# Altium PCB Sensor Brushless Driver V1.0.PcbDoc (part 2 of 2)
Units mil, origin at the board's own origin, x right, y up, seen from the top; angles counter-clockwise.
Board outline 3550 x 3910 mil, 2 copper layers (Top Layer, Bottom Layer); 141 components, 73 nets, 386 pads, 826 vias.
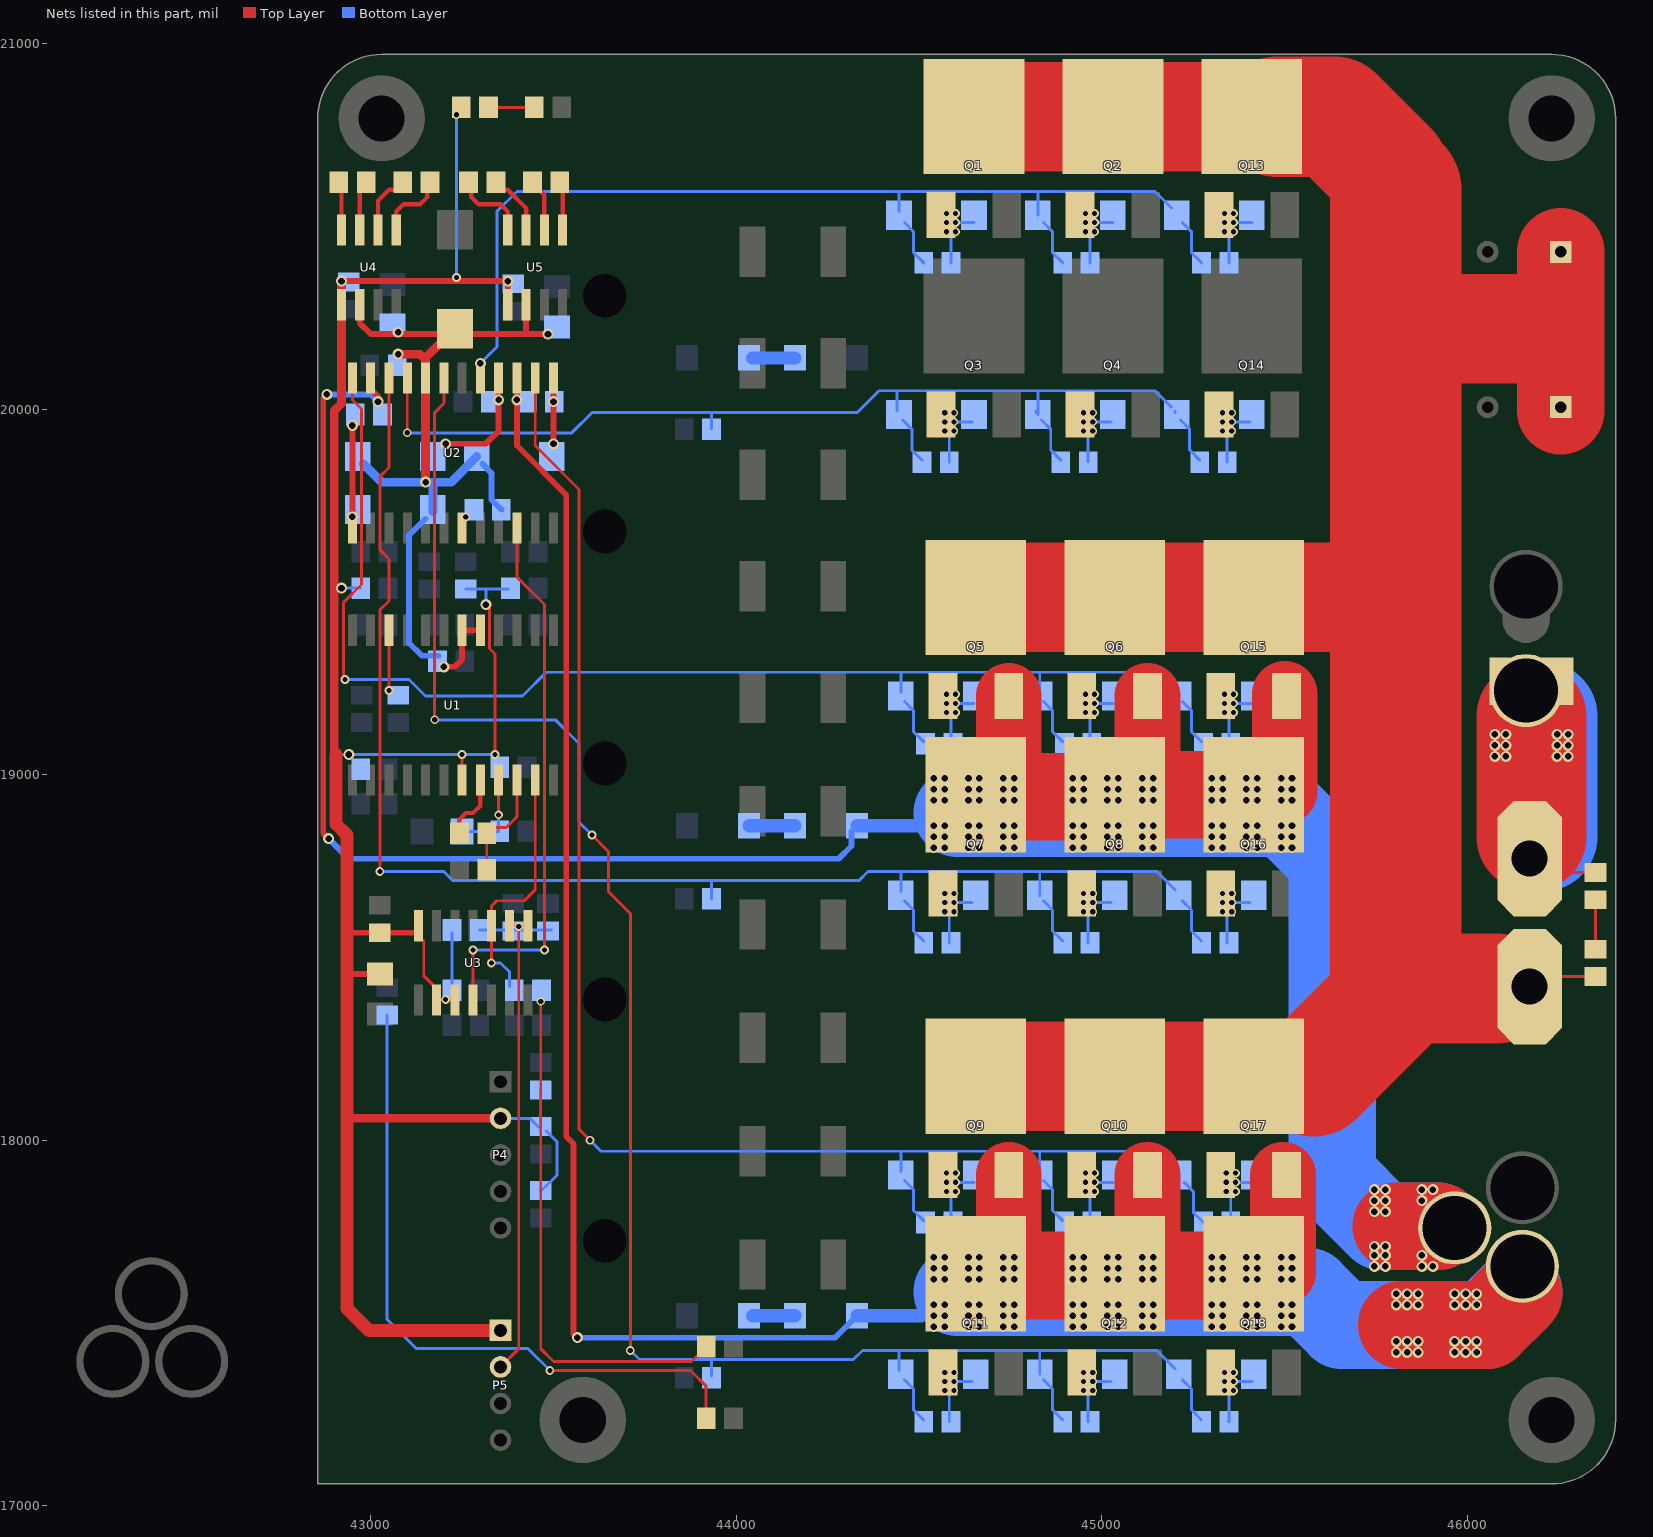
[diagram p2: the nets of this part, all layers, seen from the top]

## Via types
v1: diameter 30, hole 18, Top Layer to Bottom Layer, 597 vias
v2: diameter 24, hole 14, Top Layer to Bottom Layer, 197 vias
v3: diameter 45, hole 28, Top Layer to Bottom Layer, 32 vias

## Nets (pads, with @x,y where several pads share a name; then routed paths per layer and width w, separated by ;. In a path a pad name is that pad's centre, name@x,y a point inside that pad or via, vN(x,y) a via of type N, cw(c..) or ccw(c..) an arc to the next point about the centre after c; other vN are vias at no path point) (continued)
MV: C7.2 D10.2 pad.0@45965,17760 Q5.3 Q6.3 Q7.4 Q8.4 Q15.3 Q16.4 U2.23 | length 7054.2
  Top Layer w16: v1(42880,20040) 42870,20030 42870,18840 v1(42885,18825) ; U2.23@43000,20055 43020,20035 v1(43020,20020)
  Top Layer w180: Q7.4@44744.96,18954.96 Q5.3@44744.96,19215.16 ; Q8.4@45124.96,18949.96 Q6.3@45124.96,19215.16 ; Q16.4@45499.96,18954.96 Q15.3@45499.96,19220.16
  Top Layer w240: Q7.4@44650,18939.84 Q8.4@45014.84,18939.84 ; Q8.4@45030,18944.84 Q16.4@45394.84,18944.84 ; 45805,17765 pad.0@45920,17765
  Bottom Layer w16: v1(42880,20040) 43000,20040 v1(43020,20020) ; v1(42885,18825) 42940,18770 44280,18770 44315,18805 D10.2@44315,18845
  Bottom Layer w36: D10.2@44330,18860 v1@44535,18860
  Bottom Layer w240: 44605,18895 45500,18895 45630,18765 45630,17900 45765,17765 pad.0@45920,17765
  other v1: 45745,17655 45775,17655 45875,17655 45905,17655 45745,17685 45775,17685 45875,17685 45745,17710 45775,17710 45745,17805 45775,17805 45745,17835 45775,17835 45875,17835 45745,17865 45775,17865 45875,17865 45905,17865 44540,18800 44570,18800 44635,18800 44665,18800 44730,18800 44760,18800 44920,18800 44950,18800 45015,18800 45045,18800 45110,18800 45140,18800 45300,18800 45330,18800 45395,18800 45425,18800 45490,18800 45520,18800 44540,18830 44570,18830 44635,18830 44665,18830 44730,18830 44760,18830 44920,18830 44950,18830 45015,18830 45045,18830 45110,18830 45140,18830 45300,18830 45330,18830 45395,18830 45425,18830 45490,18830 45520,18830 44540,18860 44570,18860 44635,18860 44665,18860 44730,18860 44760,18860 44920,18860 44950,18860 45015,18860 45045,18860 45110,18860 45140,18860 45300,18860 45330,18860 45395,18860 45425,18860 45490,18860 45520,18860 44540,18930 44570,18930 44635,18930 44665,18930 44730,18930 44760,18930 44920,18930 44950,18930 45015,18930 45045,18930 45110,18930 45140,18930 45300,18930 45330,18930 45395,18930 45425,18930 45490,18930 45520,18930 44540,18960 44570,18960 44635,18960 44665,18960 44730,18960 44760,18960 44920,18960 44950,18960 45015,18960 45045,18960 45110,18960 45140,18960 45300,18960 45330,18960 45395,18960 45425,18960 45490,18960 45520,18960 44540,18990 44570,18990 44635,18990 44665,18990 44730,18990 44760,18990 44920,18990 44950,18990 45015,18990 45045,18990 45110,18990 45140,18990 45300,18990 45330,18990 45395,18990 45425,18990 45490,18990 45520,18990
MW: C17.2 D17.2 pad.0@46150,17655 Q9.3 Q10.3 Q11.4 Q12.4 Q17.3 Q18.4 U2.15 | length 7143.2
  Top Layer w16: U2.15@43400,20085 43400,19900 43535,19765 43535,18010 43555,17990 43555,17470 v1(43565,17460)
  Top Layer w180: Q11.4@44744.96,17644.96 Q9.3@44744.96,17905.16 ; Q12.4@45124.96,17639.96 Q10.3@45124.96,17905.16 ; Q18.4@45494.96,17639.96 Q17.3@45494.96,17905.16
  Top Layer w240: Q11.4@44655,17629.84 Q12.4@45019.84,17629.84 ; Q12.4@45035,17629.84 Q18.4@45399.84,17629.84 ; 45820,17495 46055,17495 pad.0@46140,17580
  Bottom Layer w16: v1(43565,17460) 44270,17460 D17.2@44330,17520
  Bottom Layer w36: D17.2@44330,17520 44505,17520
  Bottom Layer w240: 44605,17585 45565,17585 45655,17495 46050,17495 pad.0@46140,17585
  other v1: 45805,17420 45835,17420 45865,17420 45965,17420 45995,17420 46025,17420 45805,17450 45835,17450 45865,17450 45965,17450 45995,17450 46025,17450 44540,17490 44570,17490 44635,17490 44665,17490 44730,17490 44760,17490 44920,17490 44950,17490 45015,17490 45045,17490 45110,17490 45140,17490 45300,17490 45330,17490 45395,17490 45425,17490 45490,17490 45520,17490 44540,17520 44570,17520 44635,17520 44665,17520 44730,17520 44760,17520 44920,17520 44950,17520 45015,17520 45045,17520 45110,17520 45140,17520 45300,17520 45330,17520 45395,17520 45425,17520 45490,17520 45520,17520 44540,17550 44570,17550 44635,17550 44665,17550 44730,17550 44760,17550 44920,17550 44950,17550 45015,17550 45045,17550 45110,17550 45140,17550 45300,17550 45330,17550 45395,17550 45425,17550 45490,17550 45520,17550 45805,17550 45835,17550 45865,17550 45965,17550 45995,17550 46025,17550 45805,17580 45835,17580 45865,17580 45965,17580 45995,17580 46025,17580 44540,17620 44570,17620 44635,17620 44665,17620 44730,17620 44760,17620 44920,17620 44950,17620 45015,17620 45045,17620 45110,17620 45140,17620 45300,17620 45330,17620 45395,17620 45425,17620 45490,17620 45520,17620 44540,17650 44570,17650 44635,17650 44665,17650 44730,17650 44760,17650 44920,17650 44950,17650 45015,17650 45045,17650 45110,17650 45140,17650 45300,17650 45330,17650 45395,17650 45425,17650 45490,17650 45520,17650 44540,17680 44570,17680 44635,17680 44665,17680 44730,17680 44760,17680 44920,17680 44950,17680 45015,17680 45045,17680 45110,17680 45140,17680 45300,17680 45330,17680 45395,17680 45425,17680 45490,17680 45520,17680 43400,20025
NetC4_1: C4.1 D5.2 U2.16 | length 289.5
  Top Layer w16: v1(43205,19905) 43315,19905 43350,19940 43350,20020 U2.16@43350,20070
  other v1: 43350,20025
NetC7_1: C7.1 D12.2 U2.1 | length 285
  Top Layer w16: U2.1@42950,19670 v1(42950,19955)
  other v1: 42950,19705
NetC8_1: C8.1 R20.2 U1.9 | length 225
  Top Layer w8: v2(43350,18890) U1.9@43350,18980
  Bottom Layer w8: C8.1@43260,18845 43350,18845 v2(43350,18890)
NetC9_1: C9.1 R21.2 U1.10 | length 289.8
  Top Layer w8: C9.1@43317.4,18740 R21.2@43317.4,18837.4 ; R21.2@43320,18855 43370,18855 43400,18885 U1.10@43400,18985
NetC12_1: C12.1 U4.1 | length 181.6
  Top Layer w12: U4.1@43070,20490 43070,20540 43090,20560 43135,20560 43155,20580 C12.1@43155,20610
NetC12_2: C12.2 U4.2 | length 147.4
  Top Layer w12: U4.2@43020,20490 43020,20570 43050,20600 C12.2@43075,20600
NetC14_1: C14.1 U4.3 | length 115
  Top Layer w12: U4.3@42970,20490 C14.1@42970,20605
NetC14_2: C14.2 U4.4 | length 120
  Top Layer w12: U4.4@42920,20490 C14.2@42920,20610
NetC17_1: C17.1 D19.2 U2.13 | length 180
  Top Layer w16: v1(43500,19905) v1(43500,20020) U2.13@43500,20085
NetC20_1: C20.1 U5.1 | length 130
  Top Layer w12: U5.1@43525,20490 C20.1@43525,20620
NetC20_2: C20.2 U5.2 | length 130.4
  Top Layer w12: C20.2@43450,20610 43475,20585 U5.2@43475,20490
NetC22_1: C22.1 U5.3 | length 165.7
  Top Layer w12: C22.1@43340,20600 43375,20600 43425,20550 U5.3@43425,20490
NetC22_2: C22.2 U5.4 | length 196.6
  Top Layer w12: C22.2@43275,20610 43275,20580 43295,20560 43355,20560 43375,20540 U5.4@43375,20490
NetD1_1: D1.1 Q1.1 R1.2 | length 147.4
  Bottom Layer w8: R1.2@44587.4,20400 44587.4,20492.4 ; v2@44595,20510 D1.1@44650,20510
  other v2: 44575,20485 44600,20485 44575,20510 44600,20510 44575,20535 44600,20535
NetD2_1: D2.1 Q2.1 R2.2 | length 147.4
  Bottom Layer w8: R2.2@44967.4,20400 44967.4,20492.4 ; v2@44975,20510 D2.1@45030,20510
  other v2: 44955,20485 44980,20485 44955,20510 44980,20510 44955,20535 44980,20535
NetD3_1: D3.1 D4.2 | length 115
  Bottom Layer w36: D4.2@44045,20140 D3.1@44160,20140
NetD6_1: D6.1 Q3.1 R6.2 | length 147.4
  Bottom Layer w8: R6.2@44582.4,19855 44582.4,19947.4 ; v2@44590,19965 D6.1@44645,19965
  other v2: 44570,19940 44595,19940 44570,19965 44595,19965 44570,19990 44595,19990
NetD7_1: D7.1 Q4.1 R7.2 | length 147.4
  Bottom Layer w8: R7.2@44962.4,19855 44962.4,19947.4 ; v2@44970,19965 D7.1@45025,19965
  other v2: 44950,19940 44975,19940 44950,19965 44975,19965 44950,19990 44975,19990
NetD8_1: D8.1 Q5.1 R16.2 | length 147.4
  Bottom Layer w8: R16.2@44587.4,19085 44587.4,19177.4 ; v2@44595,19195 D8.1@44650,19195
  other v2: 44575,19170 44600,19170 44600,19170 44575,19195 44575,19195 44600,19195 44600,19195 44575,19220 44575,19220 44600,19220 44600,19220
NetD9_1: D9.1 Q6.1 R17.2 | length 147.4
  Bottom Layer w8: R17.2@44967.4,19085 44967.4,19177.4 ; v2@44975,19195 D9.1@45030,19195
  other v2: 44955,19170 44980,19170 44980,19170 44955,19195 44955,19195 44980,19195 44980,19195 44955,19220 44955,19220 44980,19220 44980,19220
NetD10_1: D10.1 D11.2 | length 125
  Bottom Layer w36: D11.2@44035,18860 D10.1@44160,18860
NetD13_1: D13.1 Q7.1 R23.2 | length 147.4
  Bottom Layer w8: R23.2@44582.4,18540 44582.4,18632.4 ; v2@44590,18650 D13.1@44645,18650
  other v2: 44570,18625 44595,18625 44595,18625 44570,18650 44570,18650 44595,18650 44595,18650 44570,18675 44570,18675 44595,18675 44595,18675
NetD14_1: D14.1 Q8.1 R24.2 | length 147.4
  Bottom Layer w8: R24.2@44962.4,18540 44962.4,18632.4 ; v2@44970,18650 D14.1@45025,18650
  other v2: 44950,18625 44975,18625 44975,18625 44950,18650 44950,18650 44975,18650 44975,18650 44950,18675 44950,18675 44975,18675 44975,18675
NetD15_1: D15.1 Q9.1 R26.2 | length 147.4
  Bottom Layer w8: R26.2@44587.4,17775 44587.4,17867.4 ; v2@44595,17885 D15.1@44650,17885
  other v2: 44575,17860 44600,17860 44600,17860 44575,17885 44575,17885 44600,17885 44600,17885 44575,17910 44575,17910 44600,17910 44600,17910
NetD16_1: D16.1 Q10.1 R27.2 | length 147.4
  Bottom Layer w8: R27.2@44967.4,17775 44967.4,17867.4 ; v2@44975,17885 D16.1@45030,17885
  other v2: 44955,17860 44980,17860 44980,17860 44955,17885 44955,17885 44980,17885 44980,17885 44955,17910 44955,17910 44980,17910 44980,17910
NetD17_1: D17.1 D18.2 | length 115
  Bottom Layer w36: D18.2@44045,17520 D17.1@44160,17520
NetD20_1: D20.1 Q11.1 R29.2 | length 147.4
  Bottom Layer w8: R29.2@44582.4,17230 44582.4,17322.4 ; v2@44590,17340 D20.1@44645,17340
  other v2: 44570,17315 44595,17315 44595,17315 44570,17340 44570,17340 44595,17340 44595,17340 44570,17365 44570,17365 44595,17365 44595,17365
NetD21_1: D21.1 Q12.1 R30.2 | length 147.4
  Bottom Layer w8: R30.2@44962.4,17230 44962.4,17322.4 ; v2@44970,17340 D21.1@45025,17340
  other v2: 44950,17315 44975,17315 44975,17315 44950,17340 44950,17340 44975,17340 44975,17340 44950,17365 44950,17365 44975,17365 44975,17365
NetD22_1: D22.1 R32.1 | length 1431.1
  Top Layer w8: v2(43465,18380) 43465,17430 43500,17395 43875,17395 ; 43877.6,17395 D22.1@43917.6,17435
NetD23_1: D23.1 R33.1 | length 1868.2
  Top Layer w8: v2(43490,17370) 43875,17370 43917.6,17327.4 D23.1@43917.6,17240
  Bottom Layer w8: R33.1@43045,18342.6 43045,17510 43125,17430 43430,17430 v2(43490,17370)
NetD24_2: D24.2 R40.2 | length 122.6
  Top Layer w8: D24.2@43322.4,20825 R40.2@43445,20825
NetD25_1: D25.1 F1.2 P6.1 pad.1@46160,19230 | length 772.4
  Top Layer w8: F1.2@46232.6,18732.4 D25.1@46345,18732.4
  Top Layer w300: F1.2@46175,18830 pad.1@46175,19160
  Bottom Layer w300: F1.2@46205,18830 pad.1@46205,19160
  other v1: 46075,19050 46105,19050 46245,19050 46275,19050 46075,19080 46105,19080 46245,19080 46275,19080 46075,19110 46105,19110 46245,19110 46275,19110
NetD25_2: D25.2 R41.2 | length 127.6
  Top Layer w8: R41.2@46350,18522.4 D25.2@46350,18650
NetD26_1: D26.1 Q13.1 R42.2 | length 147.4
  Bottom Layer w8: R42.2@45347.4,20400 45347.4,20492.4 ; v2@45355,20510 D26.1@45410,20510
  other v2: 45335,20485 45360,20485 45335,20510 45360,20510 45335,20535 45360,20535
NetD27_1: D27.1 Q14.1 R43.2 | length 147.4
  Bottom Layer w8: R43.2@45342.4,19855 45342.4,19947.4 ; v2@45350,19965 D27.1@45405,19965
  other v2: 45330,19940 45355,19940 45330,19965 45355,19965 45330,19990 45355,19990
NetD28_1: D28.1 Q15.1 R44.2 | length 147.4
  Bottom Layer w8: R44.2@45347.4,19085 45347.4,19177.4 ; v2@45355,19195 D28.1@45410,19195
  other v2: 45335,19170 45360,19170 45360,19170 45335,19195 45335,19195 45360,19195 45360,19195 45335,19220 45335,19220 45360,19220 45360,19220
NetD29_1: D29.1 Q16.1 R45.2 | length 147.4
  Bottom Layer w8: R45.2@45342.4,18540 45342.4,18632.4 ; v2@45350,18650 D29.1@45405,18650
  other v2: 45330,18625 45355,18625 45330,18650 45355,18650 45330,18675 45355,18675
NetD30_1: D30.1 Q17.1 R46.2 | length 147.4
  Bottom Layer w8: R46.2@45352.4,17775 45352.4,17867.4 ; v2@45360,17885 D30.1@45415,17885
  other v2: 45340,17860 45365,17860 45340,17885 45365,17885 45340,17910 45365,17910
NetD31_1: D31.1 Q18.1 R47.2 | length 147.4
  Bottom Layer w8: R47.2@45347.4,17230 45347.4,17322.4 ; v2@45355,17340 D31.1@45410,17340
  other v2: 45335,17315 45360,17315 45335,17340 45360,17340 45335,17365 45360,17365
NetR28_1: R28.1 U2.7
  other v2: 43260,19705
NetU2_10: U2.10 U3.4 | length 1501.1
  Top Layer w8: U3.4@43280,18400 v2(43280,18520) ; U2.10@43400,19675 43400,19540 43475,19465 v2(43475,18520)
  Bottom Layer w8: v2(43280,18520) v2(43475,18520)
P\W\M\: C5.1 P5.2 R10.1 R13.1 U3.8 U3.9 | length 1471.6
  Top Layer w8: P5.2@43355,17380 43405,17430 v2@43405,18586.74 ; U3.9@43380.17,18586.74 v2@43405,18586.74 ; U3.8@43426.75,18586.74 v2@43405,18586.74
  Bottom Layer w8: R13.1@43297.4,18575 R10.1@43495,18575
  other v2: 43405,18585
PHASE: R9.1 U1.22 | length 150
  Top Layer w8: v2(43050,19230) U1.22@43050,19380
PWM: R32.2 U1.11 U3.10 | length 688.9
  Top Layer w8: v2@43330.17,18485 U3.10@43330.17,18586.74 43330.17,18640.17 43345,18655 43420,18655 43450,18685 U1.11@43450,18980
  Bottom Layer w8: v2(43330,18485) 43355,18485 43380,18460 R32.2@43380,18420
UHG: D1.2 D2.2 D26.2 R1.1 R2.1 R42.1 U2.17 | length 2835.4
  Bottom Layer w8: v1(43300,20125) 43345,20170 43345,20540 43400,20595 44445,20595 ; D1.2@44445,20540 44445,20595 ; D1.2@44460,20510 44485,20485 44485,20427.6 R1.1@44512.6,20400 ; D2.2@44825,20530 44825,20595 ; D2.2@44840,20510 44865,20485 44865,20427.6 R2.1@44892.6,20400 ; D26.2@45190,20550 45145,20595 44825,20595 ; D26.2@45220,20510 45245,20485 45245,20427.6 R42.1@45272.6,20400 ; 44445,20595 44825,20595
ULG: D6.2 D7.2 D27.2 R6.1 R7.1 R15.2 R43.1 U2.21 | length 2874.2
  Top Layer w8: v2(43100,19935) U2.21@43100,20085
  Bottom Layer w8: v2(43100,19935) 43550,19935 43605,19990 44330,19990 44390,20050 44440,20050 ; R15.2@43932.4,19945 43932.4,19987.6 ; D6.2@44440,19995 44440,20050 ; D6.2@44455,19970 44480,19945 44480,19887.6 R6.1@44507.6,19860 ; D7.2@44820,19990 D7.2@44820,19995 ; D7.2@44825,19985 44825,20050 ; D7.2@44835,19970 44860,19945 44860,19887.6 R7.1@44887.6,19860 ; D27.2@45190,20005 45145,20050 44825,20050 ; D27.2@45200,19990 D27.2@45200,19995 ; D27.2@45215,19970 45240,19945 45240,19887.6 R43.1@45267.6,19860 ; 44440,20050 44825,20050
VCC_5V: C15.1 C16.1 C18.1 C23.1 D24.1 P4.2 P5.1 R3.2 R5.2 R12.2 R13.2 R18.2 R22.2 R52.2 R53.2 R54.2 R55.2 U1.7 U3.2 U3.3 U3.14 U4.5 U5.5 | length 6793.9
  Top Layer w8: 42910,19055 v1(42940,19055) ; U3.14@43135,18555 43145,18545 43145,18450 U3.2@43175,18420 ; U3.2@43180.17,18384.12 U3.3@43229.11,18384.12 ; U1.7@43250,19000 v2(43250,19055) ; v1(43315,19465) 43325,19455 43325,19345 43340,19330 v2(43340,19055)
  Top Layer w16: v1(42920,20350) v1(43375,20350) U5.5@43375,20285.28 ; 42940.12,18455.12 C18.1@43025,18455.12 ; 42947.6,18567.6 C16.1@43025,18567.6 U3.14@43122.6,18567.6
  Top Layer w24: 42905,19055 42900,19060 42900,19995 42920,20015 42920,20034.79 42919.75,20035.04 42919.75,20285.03 U4.5@42920,20285.28 v1(42920,20350) ; 42935,18060 P4.2@43355,18060
  Top Layer w36: 42905,19055 42905,18865 42935,18835 42935,18060 42935,17540 42995,17480 P5.1@43355,17480
  Bottom Layer w8: v1(42920,19510) R5.2@42972.6,19510 ; v1(42940,19055) v2(43250,19055) v2(43340,19055) ; R18.2@43222.6,18415 R13.2@43222.6,18567.6 ; v2(43235,20360) v2@43235,20795 ; R3.2@43260,19507.6 R12.2@43377.4,19507.6 ; v1(43315,19465) 43315,19505 ; P4.2@43355,18060 43435,18060 R52.2@43460,18035 ; R54.2@43465,17862.4 43467.4,17862.4 43510,17905 43510,17995 R52.2@43480,18025 ; R52.2@43465,18037.4 R53.2@43465,18137.6 R53.2@43465,18140
  other v2: 43205,18385 43235,20805
VCC_12V: C10.1 C11.1 C13.1 C19.1 C21.1 D5.1 D12.1 D19.1 R28.2 U1.17 U1.18 U2.20 U4.6 U5.6 | length 2323.6
  Top Layer w16: U4.6@42970,20285.28 42970,20235 43000,20205 v1(43485,20205) ; v1(43200,19295) 43230,19295 43250,19315 U1.18@43250,19370 ; U1.18@43250,19395 U1.17@43295,19395 ; 43425,20205 U5.6@43425,20285.28
  Top Layer w24: v1(43075,20150) 43135,20150 43150,20135 ; v1(43150,19800) U2.20@43150,20085 43150,20135 ; C11.1@43190,20180 43150,20140 43150,20135
  Bottom Layer w16: D12.1@43150,19700 43105,19655 43105,19360 43140,19325 C10.1@43185,19325 ; D19.1@43305,19850 43330,19825 43330,19752.4 R28.2@43357.4,19725
  Bottom Layer w24: D5.1@42980,19850 43030,19800 43220,19800 D19.1@43290,19870 ; D12.1@43170,19720 43170,19790
  other v1: 43075,20210
VCC_24V: C24.1 C25.1 F1.1 Q1.4 Q2.4 Q5.4 Q6.4 Q9.4 Q10.4 Q13.4 Q15.4 Q17.4 R41.1 | length 6371
  Top Layer w8: F1.1@46207.6,18447.6 R41.1@46345,18447.6
  Top Layer w240: C25.1@46255,19995 C25.1@46255,20005 46255,20210 C24.1@46255,20430
  Top Layer w300: Q1.4@44685,20799.84 Q13.4@45405,20799.84 ; Q9.4@44690,18174.84 Q17.4@45405,18174.84 ; Q5.4@44755,19485 45755,19485 ; 45865,20220 46220,20220 ; 45890,18415 46080,18415
  Top Layer w330: Q13.4@45480,20799.84 45635.16,20799.84 45785,20650 ; 45579.84,18174.84 45785,18380 45784,18381
  Top Layer w360: 45804,18440 45804,20600
VCC_REF: R21.1 U1.8 | length 175.5
  Top Layer w12: R21.1@43242.6,18840 43242.6,18877.6 43260,18895 43280,18895 43300,18915 U1.8@43300,18980
VHG: D8.2 D9.2 D28.2 R16.1 R17.1 R44.1 U2.24 | length 3721.8
  Top Layer w8: v2@42925,19260 42925,19470 42975,19520 42975,20000 42950,20025 U2.24@42950,20085
  Bottom Layer w8: v2@42925,19260 43105,19260 43150,19215 43415,19215 43480,19280 45150,19280 D28.2@45210,19220 ; D8.2@44450,19225 44450,19280 ; D8.2@44460,19200 44485,19175 44485,19117.6 R16.1@44512.6,19090 ; D9.2@44825,19210 D9.2@44825,19215 ; D9.2@44830,19225 44830,19280 ; D9.2@44840,19200 44865,19175 44865,19117.6 R17.1@44892.6,19090 ; D28.2@45220,19200 45245,19175 45245,19117.6 R44.1@45272.6,19090
  other v2: 42930,19260
VLG: D13.2 D14.2 D29.2 R23.1 R24.1 R25.2 R45.1 U2.22 | length 4167.8
  Top Layer w8: v2(43025,18735) 43025,19450 43050,19475 43050,19590 43025,19615 43025,19815 43050,19840 U2.22@43050,20085
  Bottom Layer w8: v2@43020,18735 v2(43025,18735) 43200,18735 43225,18710 43932.4,18710 ; R25.2@43932.4,18660 43932.4,18710 ; D13.2@44450,18680 44450,18735 ; D13.2@44460,18655 44485,18630 44485,18572.6 R23.1@44512.6,18545 ; D14.2@44830,18670 44830,18735 ; D14.2@44840,18655 44865,18630 44865,18572.6 R24.1@44892.6,18545 ; D29.2@45200,18685 45150,18735 44830,18735 ; D29.2@45220,18655 45245,18630 45245,18572.6 R45.1@45272.6,18545 ; 43932.4,18710 44335,18710 44360,18735 44445,18735 44830,18735
WHG: D15.2 D16.2 D30.2 R26.1 R27.1 R46.1 U2.14 | length 4300.6
  Top Layer w8: U2.14@43450,20085 43450,19900 43570,19780 43570,18030 v2(43600,18000)
  Bottom Layer w8: v2(43600,18000) 43630,17970 44450,17970 ; D15.2@44450,17915 44450,17970 ; D15.2@44460,17890 44485,17865 44485,17807.6 R26.1@44512.6,17780 ; D16.2@44830,17910 D16.2@44830,17905 44830,17970 ; D16.2@44840,17890 44865,17865 44865,17807.6 R27.1@44892.6,17780 ; D30.2@45200,17920 45150,17970 44830,17970 ; D30.2@45225,17885 45250,17860 45250,17802.6 R46.1@45277.6,17775 ; 44450,17970 44830,17970
WLG: D20.2 D21.2 D31.2 R29.1 R30.1 R31.2 R47.1 U2.19 | length 5176.5
  Top Layer w8: v2(43175,19150) 43175,19990 43200,20015 U2.19@43200,20085 ; v2(43605,18835) 43650,18790 43650,18680 43710,18620 43710,17430 v2@43715,17425
  Bottom Layer w8: v2(43175,19150) 43505,19150 43570,19085 43570,18870 v2(43605,18835) ; v2(43710,17425) 43735,17400 44320,17400 44345,17425 44445,17425 ; R31.2@43932.4,17355 43932.4,17397.4 ; D20.2@44445,17370 44445,17425 ; D20.2@44460,17345 44485,17320 44485,17262.6 R29.1@44512.6,17235 ; D21.2@44830,17360 44830,17425 ; D21.2@44840,17345 44865,17320 44865,17262.6 R30.1@44892.6,17235 ; D31.2@45200,17375 45150,17425 44830,17425 ; D31.2@45220,17345 45245,17320 45245,17262.6 R47.1@45272.6,17235 ; 44445,17425 44830,17425
pads on no net: U1.13 U2.8 U2.9 U3.1
copper on no net:
  other v1: 42430,17155
  other v2: 42430,17115
  other v3: 43580,17146.5 46230,17146.5 43515,17171.5 43645,17171.5 46165,17171.5 46295,17171.5 43490,17236.5 43670,17236.5 46140,17236.5 46320,17236.5 43515,17301.5 43645,17301.5 46165,17301.5 46295,17301.5 43580,17326.5 46230,17326.5 43030,20706.5 46230,20706.5 42965,20731.5 43095,20731.5 46165,20731.5 46295,20731.5 42940,20796.5 43120,20796.5 46140,20796.5 46320,20796.5 42965,20861.5 43095,20861.5 46165,20861.5 46295,20861.5 43030,20886.5 46230,20886.5

## Polygon pours and split planes (outlines as drawn)
GND on Top Layer "Bottom Layer-No Net" (solid, remove dead copper, pour order 21): 43510,20960 43775,20960 43775,20405 43510,20405
GND on Top Layer "Bottom Layer-No Net" (solid, remove dead copper, pour order 20): 42865,17070 43590,17070 43590,20960 43030,20960 42865,20795
GND on Top Layer "Bottom Layer-No Net" (solid, remove dead copper, pour order 15): 43550,17395 43974.99,17395 43975,20570 44430,20570 44485,20625 44485,20960 43975,20960 43550,20960
GND on Top Layer "Bottom Layer-No Net 1" (solid, pour order 27): 43160,20960 43030,20960 ccw(c43030,20795) 42865,20795 42865,20655 43160,20655
GND on Bottom Layer "Bottom Layer-No Net" (solid, remove dead copper, pour order 19): 42865,17070 43590,17070 43590,20960 43030,20960 42865,20795
GND on Bottom Layer "Bottom Layer-No Net 1" (solid, remove dead copper, pour order 23): 43519.35,20959.96 46224.76,20960.25 46395.02,20789.99 46395.02,19405.02 46340,19350 45805,19350 45805,19030 45525,18750 45525,17070 43524.81,17070
GND on Bottom Layer "Bottom Layer-No Net 1" (solid, pour order 25): 46100,20960 46230,20960 cw(c46230,20795) 46395,20795 46395,20655 46100,20655
GND on Bottom Layer "Bottom Layer-No Net 1" (solid, pour order 26): 42865,20665 42865,20795 cw(c43030,20795) 43030,20960 43170,20960 43170,20665

## Other copper
Top Layer:
  rectangle net GND: 43965,17395 44065,17570
  pour cut-out: 43585,17070 43695,17070 43695,20405 43585,20405
Bottom Layer:
  rectangle net NetD31_1: 45330,17310 45365,17370
  rectangle net NetD30_1: 45335,17855 45370,17915
  rectangle net NetD20_1: 44565,17310 44600,17370
  rectangle net NetD21_1: 44945,17310 44980,17370
  rectangle net NetD15_1: 44570,17855 44605,17915
  rectangle net NetD16_1: 44950,17855 44985,17915
  rectangle net NetD13_1: 44565,18620 44600,18680
  rectangle net NetD14_1: 44945,18620 44980,18680
  rectangle net NetD9_1: 44950,19165 44985,19225
  rectangle net NetD8_1: 44570,19165 44605,19225
  rectangle net NetD7_1: 44945,19935 44980,19995
  rectangle net NetD6_1: 44565,19935 44600,19995
  rectangle net NetD1_1: 44570,20480 44605,20540
  rectangle net NetD2_1: 44950,20480 44985,20540
  rectangle net NetD29_1: 45325,18620 45360,18680
  rectangle net NetD28_1: 45330,19165 45365,19225
  rectangle net NetD27_1: 45325,19935 45360,19995
  rectangle net NetD26_1: 45330,20480 45365,20540
  pour cut-out: 43585,17070 43695,17070 43695,20405 43585,20405
  pour cut-out: 45420,20070 45455,20035 45455,19845 45420,19810 44360,19810 44315,19855 44315,20005 44380,20070
  pour cut-out: 45425,18755 45460,18720 45460,18530 45425,18495 44365,18495 44320,18540 44320,18725 44350,18755
  pour cut-out: 45425,17445 45460,17410 45460,17220 45425,17185 44365,17185 44315,17235 44315,17415 44345,17445
  pour cut-out: 45425,19300 45460,19265 45460,19075 45425,19040 44365,19040 44330,19075 44330,19265 44365,19300
  pour cut-out: 45425,17990 45460,17955 45460,17765 45425,17730 44365,17730 44330,17765 44330,17955 44365,17990
  pour cut-out: 45420,20615 45455,20580 45455,20390 45420,20355 44360,20355 44325,20390 44325,20580 44360,20615

## Silkscreen, mask and mechanical layers (free items; w line width, h text height)
Top Overlay:
  rectangle: 46960,20250 48535,21195
  region: 48210,20095 46950,20095 46950,19385 48210,19385
  lines w8: 42895,20675 43400,20675 43420,20695 43420,20770 ; 43435,20670 43435,20775 43660,20775 43660,20570 43565,20570 43565,20670 43435,20670 ; 46005,19070 46025,19050 46325,19050 46345,19070 46345,19580 46235,19690 46115,19690 46005,19580 46005,19070
  text "BLDC" at 46340,17640 h60 r90
  text "U" at 46365,17475 h60 r90
  text "V" at 46275,17415 h60 r90
  text "SENSORED" at 45635,17395 h60
  text "W" at 46365,17350 h60 r90
  text "BLDC" at 45635,17305 h60
  text "DRIVER" at 45635,17215 h60
  text "V1.0" at 45635,17125 h60
Bottom Overlay:
  lines w8: 43005,18260 43510,18260 43540,18290 43540,18685 ; 43100,19650 43100,19270 43135,19235 43240,19235 ; 43195,18630 43195,18755 43220,18780 43465,18780 ; 43270,20405 43545,20405 43575,20375 43575,19660 ; 43315,19345 43515,19345 43535,19365 43535,19650 ; 42870,18630 42870,18760 43180,18760 43180,18630 42870,18630 ; 43005,18025 43285,18025 43285,18245 43005,18245 43005,18025 ; 43130,18970 43130,19220 43240,19220 43240,18970 43130,18970 ; 43270,20420 43270,20730 43575,20730 43575,20420 43270,20420 ; 43315,19120 43315,19330 43535,19330 43535,19145 43510,19120 43315,19120
Top Solder:
  rectangle: 44145,17430 44270,17585
  rectangle: 44145,17735 44270,17890
  rectangle: 44145,18045 44270,18200
  rectangle: 44145,18355 44270,18510
  rectangle: 44145,18665 44270,18820
  rectangle: 44145,18975 44270,19130
  rectangle: 44145,19285 44270,19440
  rectangle: 44145,19590 44270,19745
  rectangle: 44145,19895 44270,20050
  rectangle: 44145,20200 44270,20355
  lines w180: 44365,17160 45415,17160 45504.96,17249.96 45504.96,17360.16 ; 44370,18470 45410,18470 45499.96,18559.96 45499.96,18670.16 ; 44370,19785 45415,19785 45500,19870 ; 44739.96,18489.96 44739.96,18670.16 ; 44739.96,19804.96 44739.96,19985.16 ; 44739.96,20269.96 44739.96,20530.16 ; 44744.96,17179.96 44744.96,17360.16 ; 44744.96,17644.96 44744.96,17905.16 ; 44744.96,18954.96 44744.96,19215.16 ; 45119.96,19835 45119.96,19985.16 ; 45119.96,20264.96 45119.96,20530.16 ; 45124.96,17184.96 45124.96,17365.16 ; 45124.96,17639.96 45124.96,17905.16 ; 45124.96,18489.96 45124.96,18670.16 ; 45124.96,18949.96 45124.96,19215.16 ; 45494.96,17639.96 45494.96,17905.16 ; 45499.96,18954.96 45499.96,19220.16 ; 45499.96,19874.96 45499.96,19985.16 ; 45499.96,20264.96 45499.96,20530.16
  lines w240: 44650,18939.84 45014.84,18939.84 ; 44650,20254.84 45014.84,20254.84 ; 44655,17629.84 45019.84,17629.84 ; 45030,18944.84 45394.84,18944.84 ; 45030,20254.84 45394.84,20254.84 ; 45035,17629.84 45399.84,17629.84
  lines w270: 44360,17395 44360,20375
  lines w300: 44685,20799.84 45405,20799.84 ; 44690,18174.84 45405,18174.84 ; 44755,19485 45755,19485 ; 45890,18415 46080,18415
  lines w330: 45480,20799.84 45635.16,20799.84 45785,20650 ; 45579.84,18174.84 45785,18380 45579.84,18174.84
  lines w348: 44320,17245 44320,17435
  lines w360: 45804,18440 45804,20600
  lines w390: 43860,20765 44270,20765 ; 43920,17685 43920,20615 ; 43925,20615 44075,20765
Bottom Solder:
  lines w240: 44605,17585 45565,17585 45655,17495 46055,17495 46140,17580 ; 44605,18895 45500,18895 45630,18765 45630,17900 45765,17765 45920,17765 ; 44605,20210 45535,20210 45690,20055 45690,19175 45905,18960 45905,18180 46140,17945
  lines w300: 46205,18830 46205,19160
  lines w342: 43805,20790 45735,20790 45740,20785 46015,20510 46015,19680 46155,19540
Mechanical 1:
  the board outline again, w8

## Dimensions
42855,20795 to 46405,20795 on Mechanical 1
46230,20970 to 46230,17060 on Mechanical 1

## Text inside footprints (layer, text, board x,y; h text height)
C24: Top Overlay "+" at 46335,20460 h60 r180
C25: Top Overlay "+" at 46335,20035 h60 r180
P6: Top Overlay "-" at 46293,19581 h60 r90; Top Overlay "+" at 46203,19137 h60 r90